# Altium PCB ALTAIR_PD_Sergeant_V26.2b_Reference.PcbDoc (part 4 of 4)
Units mm, origin at the board's own origin, x right, y up, seen from the top; angles counter-clockwise.
Board outline 74 x 56 mm, 4 copper layers (Top Layer, Layer 1, Layer 2, Bottom Layer), stack 1.675 mm thick; 187 components, 116 nets, 602 pads, 425 vias.
Unrouted connection lines stored in the file: 4.
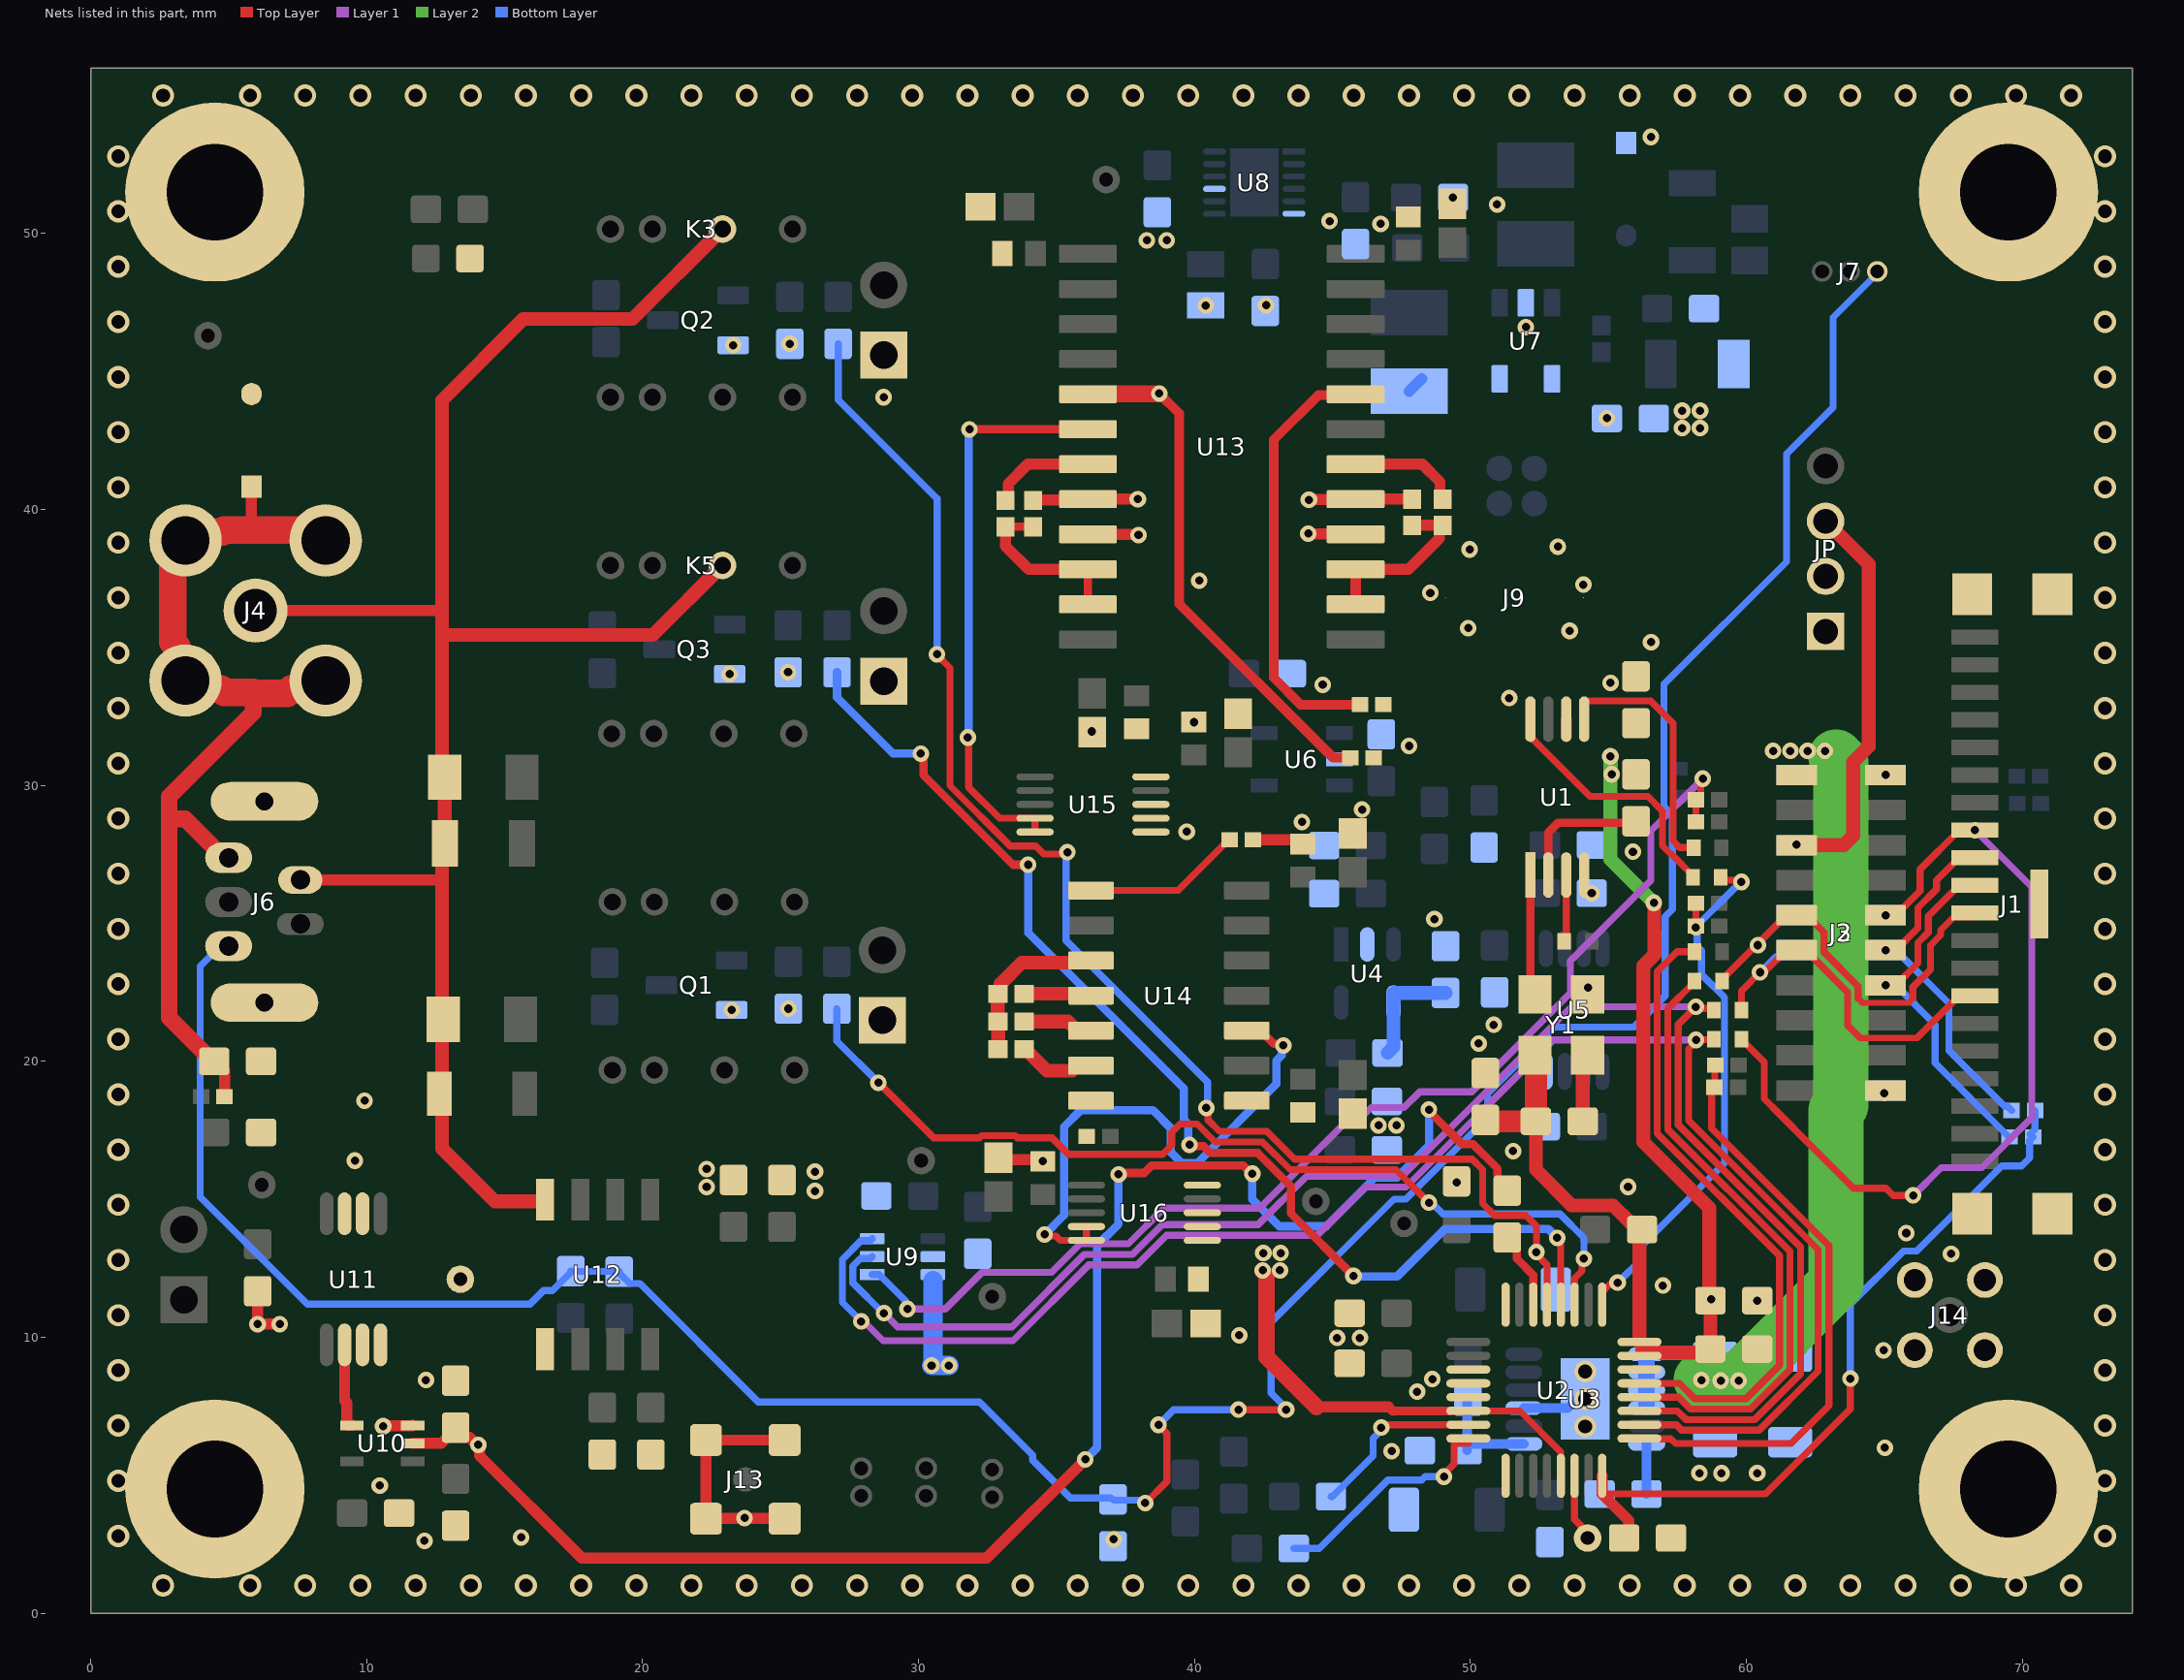
[diagram p5: the nets of this part, all layers, seen from the top]

## Via types
v1: diameter 0.6, hole 0.3, Top Layer to Bottom Layer, tented both sides, 244 vias
v2: diameter 0.8, hole 0.5, Top Layer to Bottom Layer, 122 vias
v3: diameter 0.6, hole 0.3, Top Layer to Bottom Layer, 59 vias

## Nets (pads, with @x,y where several pads share a name; then routed paths per layer and width w, separated by ;. In a path a pad name is that pad's centre, name@x,y a point inside that pad or via, vN(x,y) a via of type N, cw(c..) or ccw(c..) an arc to the next point about the centre after c; other vN are vias at no path point) (continued)
NetR5_2: R5.2 U2.10 U9.3 | length 61
  Top Layer w0.254: U2.10@56.129,6.829 57.464,6.829 57.659,6.635 60.466,6.635 62.6,8.769 62.6,13.177 57.915,17.862 57.915,20.453 58.181,20.719 v1(58.181,20.775) ; v1@58.315,20.785 58.815,20.785 R5.2@58.825,20.796
  Layer 1 w0.254: v1(27.925,10.575) 28.019,10.575 28.719,9.875 33.425,9.875 36.175,12.625 37.925,12.625 38.997,13.697 44.447,13.697 46.194,15.444 47.673,15.444 53.004,20.775 v1(58.181,20.775)
  Bottom Layer w0.254: v1(27.925,10.575) 27.24,11.26 27.24,12.82 27.922,13.502 28.252,13.502 U9.3@28.325,13.575
NetR6_2: R6.2 R7.2 R8.1 U2.8 | length 27.2
  Top Layer w0.254: U2.8@54.779,4.322 60.697,4.322 63.775,7.4 v1(63.775,8.5)
  Top Layer w0.4: U2.8@54.779,4.979 54.779,4.322 55.75,3.351 55.75,2.9 R8.1@55.575,2.725
  Bottom Layer w0.254: v1(63.775,8.5) 63.775,11.198 65.705,13.128 66.176,13.128 69.257,16.209 69.983,16.209 70.273,16.499 70.273,17.134 R7.2@70.396,17.257 ; R7.2@70.282,17.346 70.468,17.531 R6.2@70.468,18.218
NetR9_2: R9.2 R10.2 U9.1 | length 42.1
  Top Layer w0.254: R9.2@58.175,28.675 R10.2@58.175,29.479 58.197,29.479 58.345,29.627 58.348,29.627 58.348,30.067 58.429,30.148 v1(58.429,30.242)
  Layer 1 w0.254: v1(29.6,11.024) 30.979,11.024 32.31,12.356 34.828,12.356 35.859,13.387 37.609,13.387 38.9,14.678 42.368,14.678 45.515,17.825 45.91,17.825 46.407,18.322 47.597,18.322 48.172,18.897 50.048,18.897 53.628,22.477 53.628,23.638 56.54,26.55 56.54,28.353 v1(58.429,30.242)
  Bottom Layer w0.254: U9.1@28.325,12.275 28.575,12.275 29.534,11.316 29.534,11.091 v1(29.6,11.024)
NetR11_2: R11.2 U2.11 U9.2 | length 60.3
  Top Layer w0.254: U2.11@56.129,7.329 57.503,7.329 57.816,7.016 60.309,7.016 61.966,8.673 61.966,13.272 57.534,17.704 57.534,21.336 v1@58.11,21.913 ; v1(58.173,21.975) v1@58.11,21.913 ; R11.2@58.825,21.85 58.762,21.913 v1@58.11,21.913
  Layer 1 w0.254: v1(28.75,10.875) 29.248,10.377 33.389,10.377 36.017,13.006 37.767,13.006 38.839,14.078 42.307,14.078 44.054,15.825 47.515,15.825 53.665,21.975 v1(58.173,21.975)
  Bottom Layer w0.254: U9.2@28.325,12.925 28.252,12.852 27.893,12.852 27.621,12.58 27.621,11.97 28.716,10.875 v1(28.75,10.875)
NetR12_2: R12.2 R13.2 U2.9 | length 21.6
  Top Layer w0.254: U2.9@56.129,6.329 56.138,6.32 57.267,6.32 57.437,6.15 61.625,6.15 63,7.525 63,13.316 58.75,17.566 58.75,18.962 R13.2@58.85,19.062 ; R13.2@58.796,19.116 58.862,19.183 58.862,19.854 R12.2@58.875,19.866
NetR14_2: R14.2 U3.6 | length 1.8
  Bottom Layer w0.35: R14.2@56.388,4.32 U3.6@56.388,6.134
NetR16_1: R16.1 R17.2 U3.7 | length 3.6
  Bottom Layer w0.35: R17.2@49.89,5.913 R16.1@49.89,7.678 ; R17.2@50.112,6.136 U3.7@51.939,6.136
NetR19_1: R19.1 R20.2 U4.4 | length 4.1
  Bottom Layer w0.5: R19.1@47,20.309 47.219,20.527 U4.4@47.219,22.134 47.225,22.14 47.225,22.46 47.24,22.475 R20.2@49.1,22.475
NetR28_1: R28.1 R29.1 U10.2 | length 58.9
  Top Layer w0.3: v1(37.252,15.901) 37.303,15.952 38.18,15.952 38.453,16.225 41.774,16.225 42.074,15.925 v1(42.1,15.925) ; v1(48.5,18.25) 48.5,18.2 49.702,16.998 50.097,16.998 50.989,16.106 50.989,15.664 R28.1@51.339,15.314
  Top Layer w0.4: U10.2@11.67,6.153 12.703,6.153 R29.1@13.225,6.675 ; R29.1@13.225,6.725 R29.1@13.225,6.675 ; v1@14.012,6.143 13.958,6.143 13.726,6.375 13.525,6.375 R29.1@13.225,6.675 ; v1(14.05,6.105) 14.088,6.067 14.088,5.712 17.8,2 19.826,2 19.83,1.996 32.471,1.996 v1(36.05,5.575) ; R28.1@51.196,15.458 R28.1@51.339,15.314
  Bottom Layer w0.3: v1(36.05,5.575) 36.475,6 36.475,13.325 37.252,14.102 v1(37.252,15.901) ; v1(42.1,15.925) 42.1,14.998 43.077,14.021 44.774,14.021 46.544,15.791 47.341,15.791 48.5,16.95 v1(48.5,18.25)
NetR28_2: R28.2 U2.22 | length 2.8
  Top Layer w0.3: R28.2@51.339,13.614 51.689,13.264 51.689,12.846 52.279,12.256 U2.22@52.279,11.179
NetR30_2: R30.2 U2.19 | length 35
  Top Layer w0.254: v1(28.55,19.225) 30.55,17.225 32.21,17.225 32.292,17.307 33.508,17.307 33.59,17.225 34.842,17.225 35.438,16.629 38.852,16.629 39.175,16.952 39.175,17.429 39.474,17.728 40.103,17.728 40.751,17.08 42.464,17.08 43.471,16.073 47.305,16.073 v1(48.502,14.876) ; U2.19@53.779,11.179 53.788,11.188 53.788,12.138 54.051,12.401 54.051,12.78 v1(54.117,12.846)
  Bottom Layer w0.254: R30.2@27.04,21.907 27.04,20.735 v1(28.55,19.225) ; v1(48.502,14.876) 48.596,14.876 49.007,14.464 53.249,14.464 54.117,13.596 v1(54.117,12.846)
NetR33_2: R33.2 U2.21 | length 52.1
  Top Layer w0.254: v1(30.675,34.75) 30.675,34.72 31.141,34.253 31.141,29.984 33.325,27.8 34.25,27.8 34.541,27.509 35.334,27.509 v1(35.4,27.575) ; v1(40.431,18.309) 40.497,18.242 40.497,17.872 40.908,17.461 42.622,17.461 43.629,16.454 50.07,16.454 50.45,16.074 50.45,14.85 50.882,14.418 52.007,14.418 52.396,14.029 v1(52.396,13.087) 52.396,13.006 52.779,12.623 U2.21@52.779,11.179
  Bottom Layer w0.254: R33.2@27.092,46.003 27.092,43.973 30.665,40.4 30.675,40.4 v1(30.675,34.75) ; v1(35.4,27.575) 35.351,27.526 35.351,24.374 40.477,19.248 40.477,18.354 v1(40.431,18.309)
NetR36_2: R36.2 U2.20 | length 42.5
  Top Layer w0.254: v1(53.15,13.6) 53.15,13.519 53.279,13.39 U2.20@53.279,11.179
  Top Layer w0.3: v1@30.125,31.125 30.179,31.071 30.179,30.375 33.429,27.125 v1(33.975,27.125) ; v1(39.822,16.978) 39.879,16.921 40.339,16.921 40.583,16.676 42.297,16.676 43.496,15.477 43.496,14.49 v1(45.765,12.221)
  Bottom Layer w0.3: R36.2@27.05,34.1 27.05,33.187 29.086,31.151 30.085,31.151 v1(30.086,31.152) ; v1(33.975,27.125) 33.975,24.663 39.625,19.012 39.625,17.878 39.775,17.728 39.775,17.025 v1(39.822,16.978) ; v1@45.775,12.2 47.35,12.2 49.075,13.925 52.824,13.925 v1(53.15,13.6)
NetR42_1: R42.1 U2.31 | length 6.5
  Top Layer w0.254: v1(46.775,6.725) 46.869,6.725 46.973,6.829 U2.31@49.929,6.829
  Bottom Layer w0.254: R42.1@44.95,4.225 45,4.225 46.475,5.7 46.475,6.331 46.775,6.631 v1(46.775,6.725)
NetR44_1: R44.1 U2.32 | length 8.4
  Top Layer w0.254: v1(49.045,4.947) 49.045,5.041 49.402,5.398 49.406,5.402 49.406,6.129 49.427,6.15 49.929,6.15
  Bottom Layer w0.254: R44.1@43.6,2.346 44.532,2.346 47.012,4.826 48.237,4.826 48.358,4.947 v1(49.045,4.947)
NetR46_2: R46.2 R47.2 U13.2 U13.3 | length 6.4
  Top Layer w0.4: U13.2@45.843,36.56 45.843,37.83 47.755,37.83 48.875,38.95 48.875,39.3 R47.2@49,39.425 R46.2@47.9,39.425
NetR47_1: R47.1 U13.6 | length 4
  Top Layer w0.4: U13.6@45.843,41.64 48.26,41.64 48.901,40.999 48.901,40.499 R47.1@49,40.4
NetR48_1: R48.1 U13.8 | length 15.8
  Top Layer w0.35: U13.8@45.803,44.139 44.489,44.139 42.875,42.525 42.875,33.9 43.85,32.925 R48.1@46,32.925
  Top Layer w0.4: U13.8@45.803,44.139 U13.8@45.843,44.18
NetR49_2: R49.2 R50.2 U13.22 U13.23 | length 6.3
  Top Layer w0.3: R50.2@33.15,39.35 33.175,39.375 R49.2@34.154,39.375 ; U13.23@36.143,36.56 U13.22@36.143,37.83
  Top Layer w0.4: R50.2@33.15,39.375 33.15,38.675 33.995,37.83 U13.22@36.143,37.83
NetR50_1: R50.1 U13.19 | length 3.8
  Top Layer w0.3: R50.1@33.15,40.325 R50.1@33.256,40.431
  Top Layer w0.4: R50.1@33.256,40.431 33.256,40.931 33.965,41.64 U13.19@36.143,41.64
NetR51_1: R51.1 U13.17 | length 19
  Top Layer w0.35: v1(38.725,44.2) 39.45,43.475 39.45,36.575 45.025,31 R51.1@45.65,31
  Top Layer w0.4: U13.17@36.143,44.18 U13.17@36.153,44.19 ; v1@38.715,44.19 v1(38.725,44.2)
  Top Layer w0.6: U13.17@36.153,44.19 v1@38.715,44.19
NetR52_1: R52.1 R53.1 R54.1 U14.3 | length 6.1
  Top Layer w0.5: R54.1@32.9,20.441 32.888,20.454 32.888,21.433 R53.1@32.875,21.446 R52.1@32.875,22.45 32.9,22.45 32.975,22.525 32.975,22.808 33.743,23.576 36.175,23.576 U14.3@36.25,23.651
NetR52_2: R52.2 U14.4 | length 2.5
  Top Layer w0.5: R52.2@33.825,22.45 36.181,22.45 U14.4@36.25,22.381
NetR53_2: R53.2 U14.5 | length 2.6
  Top Layer w0.5: R53.2@33.825,21.446 35.415,21.446 35.675,21.186 36.175,21.186 U14.5@36.25,21.111
NetR54_2: R54.2 U14.6 | length 2.8
  Top Layer w0.5: R54.2@33.85,20.441 33.925,20.366 33.95,20.366 34.657,19.659 35.568,19.659 35.75,19.841 U14.6@36.25,19.841
NetR55_1: R55.1 U14.1 | length 5.8
  Top Layer w0.254: U14.1@36.25,26.191 39.406,26.191 41.25,28.035 R55.1@41.275,28.035
NetR56_1: R56.1 U2.12 | length 22.6
  Top Layer w0.254: U2.12@56.129,7.829 57.542,7.829 57.974,7.397 60.151,7.397 61.585,8.831 61.585,13.114 57.153,17.546 57.153,21.903 58.125,22.875 R56.1@58.125,22.916
NetR57_1: R57.1 U2.13 | length 23.6
  Top Layer w0.254: U2.13@56.129,8.329 57.581,8.329 58.132,7.778 59.993,7.778 61.204,8.989 61.204,12.956 56.772,17.388 56.772,23.253 57.494,23.975 58.121,23.975 R57.1@58.125,23.971
NetR58_1: R58.1 Y1.1 | length 2.4
  Top Layer w0.254: Y1.1@54.075,20.004 Y1.1@54.225,20.154
  Top Layer w0.5: R58.1@54.075,17.825 Y1.1@54.075,20.004
NetR59_1: R59.1 U1.2 | length 4.9
  Top Layer w0.3: U1.2@52.825,26.75 52.825,28.295 53.176,28.646 55.95,28.646 R59.1@56.004,28.7
NetR60_2: R60.2 U1.3 | length 2.3
  Top Layer w0.254: R60.2@53.475,24.425 U1.3@53.475,26.75
NetR61_1: R61.1 R63.1 R64.2 U2.17 | length 20.2
  Top Layer w0.254: U2.17@54.779,11.179 54.779,11.638 55.054,11.912 55.274,11.912 v1(55.34,11.978) ; v1(58.171,24.852) 58.171,24.896 R64.2@58.175,24.9 R63.1@58.175,25.725 ; R61.1@59.08,26.77 59.198,26.652 59.198,26.566 59.759,26.566 v1(59.825,26.5)
  Bottom Layer w0.254: v1(55.34,11.978) 56.225,12.863 56.225,13.327 59.209,16.311 59.209,22.316 58.375,23.15 58.375,24.017 58.218,24.174 58.218,24.806 v1(58.171,24.852) ; v1@58.173,24.855 58.173,24.875 59.798,26.5 v1(59.825,26.5)
NetR61_2: R61.2 U1.8 | length 9.4
  Top Layer w0.25: U1.8@52.175,32.4 52.175,31.763 54.34,29.598 56.439,29.598 56.97,29.068 56.97,27.805 57.284,27.491 57.309,27.491 58.075,26.725 R61.2@58.075,26.675
NetR62_2: R62.2 U1.5 | length 9.3
  Top Layer w0.25: U1.5@54.125,32.4 54.125,32.996 54.185,33.056 56.535,33.056 57.347,32.245 57.347,27.986 57.583,27.75 58.096,27.75 R62.2@58.1,27.746
NetTP8_1: TP8.1 U2.6 | length 2.4
  Top Layer w0.254: U2.6@53.779,4.979 53.779,3.398 54.25,2.927 TP8.1@54.25,2.725
NetU1_1: U1.1 Y1.3 | length 4.4
  Top Layer w0.3: U1.1@52.175,26.75 52.171,26.745 52.171,22.604 Y1.3@52.35,22.425
NetU10_4: U10.4 U11.6 | length 3.1
  Top Layer w0.4: U11.6@9.202,9.725 9.202,7.708 9.282,7.628 9.282,6.828 9.307,6.803 U10.4@9.47,6.803
NetU13_18: U13.18 U15.9 U15.10 | length 20.7
  Top Layer w0.254: v1(31.788,31.736) 31.819,31.705 31.819,29.93 32.94,28.81 U15.9@34.225,28.81 U15.10@34.225,28.31
  Top Layer w0.3: v1(31.85,42.9) 31.855,42.905 36.138,42.905 U13.18@36.143,42.91
  Bottom Layer w0.3: v1@31.804,31.721 31.819,31.736 31.819,42.869 v1(31.85,42.9)
NetU14_10: U14.10 U16.9 U16.10 | length 19.8
  Top Layer w0.254: v1(34.575,13.725) 34.628,13.672 34.977,13.672 35.137,13.512 U16.10@36.088,13.512 ; U16.10@36.088,13.506 U16.9@36.088,14.012
  Top Layer w0.3: U14.10@41.9,21.111 42.4,21.111 42.879,20.632 43.168,20.632 v1(43.225,20.575)
  Bottom Layer w0.3: v1(34.575,13.725) 35.275,14.425 35.275,17.625 35.875,18.225 38.498,18.225 39.145,17.578 39.145,16.707 39.544,16.308 40.1,16.308 42.975,19.183 42.975,20.024 43.168,20.217 43.168,20.518 v1(43.225,20.575)
PD_A: C30.1 C31.1 J4.1 J6.2 K3.3 K5.3 R39.1 R40.1 U12.8 | length 67.8
  Top Layer w0.3: 12.707,25.325 12.732,25.35
  Top Layer w0.4: J4.1@5.975,36.336 12.732,36.336 ; J6.2@7.6,26.575 12.732,26.575
  Top Layer w0.5: C30.1@12.632,18.826 C30.1@12.732,18.826 ; R39.1@12.775,21.525 R39.1@12.732,21.525 ; U12.8@16.47,14.987 16.409,14.926 14.649,14.926 12.732,16.843 C30.1@12.732,18.826 ; K5.3@22.898,37.971 20.377,35.45 12.732,35.45 ; K3.3@22.898,50.163 19.635,46.9 15.675,46.9 12.732,43.957 12.732,36.336 12.732,35.45 ; C30.1@12.732,18.826 R39.1@12.732,21.525 ; R39.1@12.732,21.525 12.732,25.35 12.732,26.575 12.732,27.496 12.832,27.596 R40.1@12.832,30.295 12.732,30.395 12.732,35.45
PD_K: C0.2 D3.1 J4.2 J4.3 J4.4 J4.5 J6.1 R0.2 | length 37.8
  Top Layer w0.254: 5.775,39.25 5.825,39.3
  Top Layer w0.4: 2.85,21.575 2.85,21.725 ; C0.2@4.425,20 C0.2@4.475,20 ; C0.2@4.525,20 4.85,19.675 R0.2@4.85,18.721 ; 5.825,39.3 D3.1@5.825,40.82 ; 5.875,33.375 5.909,33.341
  Top Layer w0.6: 2.85,21.575 C0.2@4.425,20 ; 2.85,21.725 2.85,28.673 ; J6.1@5,27.375 4.835,27.375 3.426,28.785 2.962,28.785 2.85,28.673 ; 5.892,33.358 5.892,32.642 2.85,29.6 2.85,28.673
  Top Layer w1: 5.875,33.375 4.833,33.375 4.723,33.485 3.746,33.485 J4.5@3.435,33.796 2.975,33.796 3.124,33.945 3.124,35.045 2.975,35.195 2.975,37.977 3.435,38.437 J4.4@3.435,38.876 3.746,39.187 4.77,39.187 4.833,39.25 5.775,39.25 7.702,39.25 8.075,38.876 J4.2@8.515,38.876 ; 5.909,33.341 7.117,33.341 7.261,33.485 8.204,33.485 J4.3@8.515,33.796
SOLDIER_GUARD: J9.2 J9.3
  other v1: 53.6,35.6 49.925,35.7 48.55,36.975 54.1,37.275 49.975,38.55 53.175,38.65
SPI_MISO: J1.11 J2.10 J3.09 R56.2 | length 16.3
  Top Layer w0.225: 64.221,22.12 65.879,22.12
  Top Layer w0.23: 64.056,22.285 64.221,22.12 ; 65.879,22.12 66.041,22.281
  Top Layer w0.254: R56.2@59.125,22.916 59.125,22.966 60.368,24.209 v1(60.42,24.208) ; v1@60.506,24.122 60.506,24.346 61.456,25.295 62.192,25.295 62.819,24.668 62.819,23.956 64.056,22.719 64.056,22.285 ; 66.041,22.281 66.041,22.691 66.675,23.325 66.675,24.204 67.05,24.579 67.05,24.753 67.524,25.227 68.143,25.227 J1.11@68.291,25.375
  Bottom Layer w0.254: v1(60.42,24.208) 60.419,24.259 61.456,25.295 J3.09@61.824,25.295
SPI_MOSI: J1.8 J2.09 J3.10 R5.1 | length 31.1
  Top Layer w0.254: R5.1@59.825,20.796 59.825,20.746 59.948,20.623 59.998,20.623 60.65,19.971 60.65,18.636 61.202,18.084 62.276,17.01 63.886,15.4 65.065,15.4 65.325,15.14 v1(66.053,15.14) ; v1(65.05,25.295) 65.418,25.295 66.3,26.177 66.3,26.959 67.716,28.375 v1(68.291,28.375)
  Layer 1 w0.254: v1(66.053,15.14) 67.062,16.149 68.538,16.149 70.35,17.961 70.35,26.316 v1(68.291,28.375)
SPI_SCLK: J1.14 J2.12 J3.11 R11.1 | length 14.1
  Top Layer w0.225: 64.125,20.85 66.191,20.85
  Top Layer w0.254: R11.1@59.825,21.85 59.825,22.55 60.566,23.291 60.722,23.291 61.456,24.025 62.192,24.025 62.434,23.784 62.434,23.741 63.675,22.5 63.675,21.3 64.125,20.85 ; 66.191,20.85 J1.14@67.568,22.227 ; J1.14@67.568,22.227 67.716,22.375 J1.14@68.291,22.375
  Bottom Layer w0.254: v1(60.5,23.225) 61.059,23.784 61.583,23.784 J3.11@61.824,24.025
STRT1: J1.9 J2.11 J3.12 R6.1 | length 13.2
  Top Layer w0.254: v1(65.05,24.025) 65.418,24.025 66.222,24.829 66.222,25.56 66.9,26.238 66.9,26.559 67.716,27.375 J1.9@68.291,27.375
  Bottom Layer w0.254: v1(65.05,24.025) 65.418,24.025 67.343,22.1 67.343,20.392 69.37,18.366 69.47,18.366 R6.1@69.618,18.218
STRT2: J1.10 J2.13 J3.14 R7.1 | length 13.1
  Top Layer w0.254: v1(65.05,22.755) 65.418,22.755 66.225,23.562 66.225,24.293 66.603,24.671 66.603,25.262 67.716,26.375 J1.10@68.291,26.375
  Bottom Layer w0.254: v1(65.05,22.755) 65.418,22.755 66.841,21.332 66.841,19.936 69.521,17.257 R7.1@69.546,17.257
SYS_DVDD: C51.2 C52.2 C54.2 C55.2 J2.06 J3.05 JP.3 R1.1 R58.2 R59.2 U1.6 U2.15 U2.16 Y1.4 | length 56.7
  Top Layer w0.254: Y1.4@52.325,20.154 Y1.4@52.375,20.104
  Top Layer w0.4: U1.6@53.475,31.782 U1.6@53.475,32.4 ; v1(55.075,31.05) v1@55.129,31.05
  Top Layer w0.5: R58.2@52.375,17.825 52.375,16.075 53.673,14.777 55.173,14.777 55.8,14.15 55.925,14.15 56.089,13.986 56.089,13.861 56.129,13.821 U2.16@56.129,9.829 56.229,9.729 56.229,9.518 56.301,9.446 58.571,9.446 C51.2@58.7,9.575 C52.2@58.7,11.329 ; v1(56.651,25.746) 56.67,25.727 56.67,24.699 56.675,24.694 56.675,23.869 56.268,23.462 56.268,17.079 58.658,14.689 58.658,11.371 C52.2@58.7,11.329 ; v1(58.725,11.375) 58.7,11.375 C52.2@58.7,11.329 ; J2.06@61.824,27.835 63.535,27.835 63.875,28.175 63.875,30.85 64.437,31.412 64.437,38.013 JP.3@62.875,39.575
  Top Layer w0.8: C54.2@50.596,17.825 R58.2@52.375,17.825 Y1.4@52.375,20.104
  Layer 2 w0.5: v1@55.075,31.023 55.106,30.992 55.106,30.419 v1(55.125,30.4) ; v1(55.075,31.05) 55.075,27.321 v1(56.651,25.746)
  other v1: 61.824,27.86
SYS_GND: C0.1 C00.1 C1.1 C2.1 C3.1 C4.1 C5.1 C6.1 C7.1 C8.1 C9.1 C10.1 C11.1 C12.1 C13.1 C14.1 C17.2 C18.2 C19.2 C20.2 C21.2 C22.1 C23.1 C24.1 C25.1 C26.1 C27.1 C28.1 C29.1 C33.1 C34.1 C35.1 C36.1 C37.1 C38.1 C39.1 C40.1 C41.1 C42.1 C43.1 C44.1 C45.1 C46.1 C47.1 C48.1 C49.1 C50.1 C51.1 C52.1 C53.1 C54.1 C55.1 C56.1 D1.1 D2.1 D3.2 H1.1 H2.1 H3.1 H4.1 J1.MP1 J1.MP2 J1.MP3 J1.MP4 J1.MP5 J2.01 J2.19 J3.02 J3.20 J6.6 J10.1 J11.1 J12.1 J13.2 J14.2 J14.3 J14.4 J14.5 JP.2 Q1.2 Q2.2 Q3.2 R8.2 R14.1 R15.1 R17.1 R20.1 R22.1 R25.1 R26.2 R27.2 R29.2 R31.2 R34.2 R37.2 R45.2 R46.1 R48.2 R49.1 R51.2 R55.2 R99.1 U1.4 U2.1 U2.14 U2.24 U2.27 U2.28 U2.29 U3.9 U3.13 U4.2 U5.4 U6.2 U7.2 U8.6 U8.9 U9.5 U10.3 U11.2 U11.3 U11.7 U12.1 U13.4 U13.5 U13.20 U13.21 U14.7 U14.8 U15.1 U15.2 U15.3 U15.5 U16.1 U16.2 U16.3 U16.5 Y1.2 | length 29.1
  Top Layer w0.3: U2.24@51.279,11.179 U2.24@51.279,11.65
  Top Layer w0.4: C25.1@6.055,11.669 6.053,11.667 6.053,10.478 v1(6.05,10.475) v1(6.85,10.475) ; v1(10.6,6.775) 10.614,6.789 11.656,6.789 U10.3@11.67,6.803 ; J13.2@25.15,3.425 25.138,3.437 23.713,3.437 v1(23.7,3.45) 23.688,3.437 22.312,3.437 J13.2@22.3,3.425 J13.2@22.3,6.275 J13.2@25.15,6.275 ; C46.1@32.9,16.501 32.963,16.438 34.445,16.438 v1(34.507,16.375) ; R49.1@34.154,40.325 34.177,40.347 36.121,40.347 36.146,40.372 37.948,40.372 v1(37.95,40.375) ; U13.21@36.143,39.1 37.933,39.1 v1@37.95,39.117 ; R55.2@42.125,28.035 43.772,28.035 C37.1@43.932,27.875 ; v1(44.125,39.125) 44.137,39.112 45.831,39.112 U13.4@45.843,39.1 ; v1(44.15,40.35) 44.16,40.36 45.833,40.36 45.846,40.372 47.898,40.372 R46.1@47.9,40.375
  Bottom Layer w0.35: U3.9@51.939,7.436 53.539,7.436 53.778,7.675 54.078,7.675 U3.13@54.164,7.761
  other v1: 12.1,2.625 37.075,2.674 15.6,2.75 10.475,4.625 58.3,5.075 59.1,5.07 60.4,5.075 47.15,5.875 65.025,6 48.075,8.025 12.15,8.45 48.625,8.48 64.975,9.525 45.175,9.975 46,9.975 41.625,10.075 60.4,11.329 56.975,11.875 67.425,13.025 65.8,13.775 26.25,15.3 22.325,15.445 55.717,15.453 49.5,15.613 26.25,16 22.325,16.1 9.575,16.4 51.55,16.75 46.675,17.675 47.325,17.675 9.925,18.575 65,18.85 50.3,20.65 50.85,21.325 23.232,21.857 25.286,21.907 54.275,22.675 48.7,25.15 54.4,26.09 55.893,27.596 39.722,28.325 43.897,28.675 46.075,29.125 65.05,30.375 47.778,31.428 36.277,31.955 39.991,32.288 51.407,33.162 44.65,33.645 55.082,33.718 23.157,34.031 25.275,34.1 56.552,35.188 40.175,37.425 37.976,39.076 54.95,43.304 28.74,44.067 23.284,45.953 25.338,46.003 52.016,46.61 40.415,47.392 42.6,47.4 38.275,49.75 39,49.75 46.75,50.35 44.9,50.45 50.968,51.05 49.375,51.3 56.55,53.5
  other v2: 2.625,1 5.775,1 7.775,1 9.775,1 11.775,1 13.775,1 15.775,1 17.775,1 19.775,1 21.775,1 23.775,1 25.775,1 27.775,1 29.775,1 31.775,1 33.775,1 35.775,1 37.775,1 39.775,1 41.775,1 43.775,1 45.775,1 47.775,1 49.775,1 51.775,1 53.775,1 55.775,1 57.775,1 59.775,1 61.775,1 63.775,1 65.775,1 67.775,1 69.775,1 71.775,1 1,2.8 73,2.8 1,4.8 73,4.8 1,6.8 73,6.8 1,8.8 73,8.8 1,10.8 73,10.8 1,12.8 73,12.8 1,14.8 73,14.8 1,16.8 73,16.8 1,18.8 73,18.8 1,20.8 73,20.8 1,22.8 73,22.8 1,24.8 73,24.8 1,26.8 73,26.8 1,28.8 73,28.8 1,30.8 73,30.8 1,32.8 73,32.8 1,34.8 73,34.8 1,36.8 73,36.8 1,38.8 73,38.8 1,40.8 73,40.8 1,42.8 73,42.8 1,44.8 73,44.8 1,46.8 73,46.8 1,48.8 73,48.8 1,50.8 73,50.8 1,52.8 73,52.8 2.625,55 5.775,55 7.775,55 9.775,55 11.775,55 13.775,55 15.775,55 17.775,55 19.775,55 21.775,55 23.775,55 25.775,55 27.775,55 29.775,55 31.775,55 33.775,55 35.775,55 37.775,55 39.775,55 41.775,55 43.775,55 45.775,55 47.775,55 49.775,55 51.775,55 53.775,55 55.775,55 57.775,55 59.775,55 61.775,55 63.775,55 65.775,55 67.775,55 69.775,55 71.775,55
SYS_VBAT: C1.2 C2.2 C14.2 J2.02 J3.01 JP.1 L1.1 U3.1 U3.2 U3.3 U3.4 U7.4 U7.5 | length 31.2
  Layer 2 w2: v1(58.375,8.45) 59.75,8.45 63.25,11.95 63.25,18.221 63.433,18.404 63.433,30.842 63.25,31.025 ; v1(59.075,8.425) 59.05,8.4 59.4,8.4 59.425,8.425 v1(59.725,8.425)
  Bottom Layer w0.4: L1.1@47.784,44.281 L1.1@48.238,44.735
  Bottom Layer w0.5: U3.1@56.393,9.424 C1.2@58.748,9.424
  Bottom Layer w0.6: U3.4@56.389,7.478 U3.3@56.389,8.086 U3.2@56.389,8.736 U3.1@56.389,9.386
  other v1: 60.975,31.25 61.6,31.25 62.225,31.25 62.85,31.25 57.675,42.95 58.325,42.95 57.675,43.575 58.325,43.575
TMP_COM: C32.1 J6.5 J7.3 R45.1 RT1.1 | length 110.5
  Top Layer w0.254: v1(38.22,3.991) 39,4.771 39,6.507 38.7,6.807 v1(38.7,6.828) ; v1(41.6,7.375) v1(43.325,7.375)
  Bottom Layer w0.254: J6.5@5,24.175 4.7,24.175 3.969,23.444 3.969,15.081 7.85,11.2 15.925,11.2 16.415,11.69 16.74,11.69 17.4,12.35 RT1.1@17.4,12.4 17.413,12.387 19.142,12.387 C32.1@19.154,12.375 19.154,12.325 19.527,11.952 19.902,11.952 24.198,7.657 32.212,7.657 34.135,5.733 34.135,5.543 35.504,4.175 R45.1@36.975,4.175 ; R45.1@37.05,4.125 37.075,4.1 38.018,4.1 38.127,3.991 v1(38.22,3.991) ; v1(38.7,6.828) 38.702,6.828 39.249,7.375 v1(41.6,7.375) ; v1(43.325,7.375) 43.325,7.43 42.781,7.974 42.781,10.552 47.235,15.006 47.666,15.006 50.619,17.959 50.619,18.824 53.039,21.244 55.938,21.244 57.063,22.369 57.063,25.243 57.298,25.478 57.298,25.481 57.322,25.505 57.322,28.944 57.021,29.245 57.021,33.665 61.462,38.106 61.462,42.012 63.15,43.7 63.15,46.956 64.75,48.556 J7.3@64.75,48.625
VBIAS: TP6.1 U2.5 U2.30 U9.6 U11.8 | length 19.9
  Top Layer w0.254: U2.30@49.929,7.329 51.796,7.329 53.279,5.846 U2.5@53.279,4.979
  Top Layer w0.3: 47.19,7.328 U2.30@49.278,7.328 ; U2.30@49.279,7.329 U2.30@49.929,7.329
  Top Layer w0.35: 47.041,7.477 47.19,7.328
  Top Layer w0.4: v1@42.487,13.013 v1@42.5,13.025 ; 44.423,7.477 47.041,7.477
  Top Layer w0.6: v1@42.475,12.4 42.613,12.262 42.613,9.973 42.613,9.287 44.423,7.477
  Bottom Layer w0.7: 30.525,12.05 30.525,9.025 v1(30.475,8.975) v1(31.1,8.975)
  other v1: 42.475,12.425 43.1,12.425 42.5,13.05 43.125,13.05
pads on no net: U1.7 U2.7 U2.25 U3.5 U5.1 U5.3 U5.7 U5.8 U8.4 U8.7 U11.5 U12.3

## Polygon pours and split planes (outlines as drawn)
SYS_GND on Layer 2 "SYS_GND_L03_P001" (solid, pour order 49): 0.025,56 74,56 74,0 0.1,0 0.025,0.075
SYS_VBAT on Layer 2 "SYS_VBAT_L03_P001" (solid, pour order 35): 58.148,39.237 58.8,33 60.025,31.125 60.075,31.125 60.775,30.425 63.65,30.425 64.3,31.075 64.3,36.325 62.164,36.59 59.225,42.475 58.55,43.95 57.375,43.95 57.225,43 57.625,41.25
7V5 on Layer 2 "7V5_L03_P001" (solid, pour order 15): 48.475,12.75 50.25,12.75 50.25,11.625 47.875,9.85 25.877,10.073 24.925,11.025 24.925,14.65 41.325,14.65 41.925,14.05 41.925,12.125 46.878,12.125 47.521,12.768
7V5 on Layer 2 "7V5_L03_P002" (solid, pour order 16): 41.225,15.325 41.101,15.325 40.288,14.512 41.225,13.574 41.225,13.325 43.8,13.325 45.9,15.425 45.9,20.55 48.675,23.325 48.675,47.525 40.375,50.025 35.85,51.325 35.5,51.9 34.332,51.9 33.812,50.863 39.688,33.938 42.5,31.125 42.5,28.85 42.55,28.8 41.225,27.475
-15V on Layer 2 "-15V_L03_P002" (solid, pour order 2): 47.975,34.11 46.325,37.2 46.325,48.725 46.975,49.375 47.625,48.725 50,48.787 50.538,48.787 51.4,47.925 51.4,21.95 49.638,20.188 49.375,20.125 47.975,20.125 47.725,20.375 47.725,22.1 47.975,22.35
SYS_DVDD on Layer 2 "SYS_DVDD_L03_P001" (solid, pour order 47): 62.157,27.51 61.6,26.953 61.6,25.675 60.7,24.775 57.025,24.775 56.95,24.85 56.175,25.7 56.625,26.15 57.075,26.15 58.575,26.275 59.823,26.5 61.499,28.176 62.2,28.176 62.162,27.513
-15V on Layer 2 "-15V_L03_P001" (solid, pour order 1): 35.85,51.85 35.85,50.95 36.5,50.75 46.381,45.707 49.7,47.775 50.023,47.756 51.137,48.497 37.787,52.887 36.5,53.075 35.85,52.425
SYS_GND on Layer 1 "SYS_GND_L02_P001" (solid, pour order 31): 0,56 0.025,55.975 74,55.975 74,0 0.05,0
A5V on Layer 1 "A5V_L02_P001" (solid, pour order 19): 29.126,16.627 29.625,15.5 42.687,20.787 52.875,28.65 52.9,30.9 52.875,30.925 52.787,30.837 51.351,30.9 45.155,26.921 45.2,25.825 44.586,25.211 42.493,25.211 41.87,24.811 39.925,26.756 39.925,33.475 39.7,33.7 37.75,33.7 37.75,31.225 35.784,29.259 35.82,20.926
VBIAS on Layer 1 "VBIAS_L02_P001" (solid, remove dead copper, pour order 29): 42.3,13.575 42.325,13.55 43.85,13.55 43.85,11.982 26.677,4.65 17.112,4.65 12.325,7.734 12.325,10.675 12.325,13 12.825,13.5 13.85,13.5 14.4,12.95 14.4,9.843 16.979,7.534 19.115,6.832 33.175,13 35.94,13.396
-15V on Layer 1 "-15V_L02_P001" (solid, pour order 3): 39.374,14.748 20.7,7.575 19.3,7.75 19.525,8.75 38.4,16.3 40.725,17.574 47.75,21.825 49.45,21.825 49.45,20.175 46.1,18.199 44.03,16.979 42.878,16.3 42.075,15.826
SYS_GND on Top Layer "SYS_GND_L01_P002" (solid, remove dead copper, pour order 50): 60.2,41.15 60.2,38.921 60.721,38.4 61.95,38.4 61.95,41.075 61.9,41.15 74,41.15 74,56 0.025,56 0.05,0.075 0.125,0 53.275,0 53.15,0.125 53.15,13.975 57.275,18.1 57.275,38.25 57.3,38.25
SYS_GND on Top Layer "SYS_GND_L01_P001" (solid, remove dead copper, pour order 48): 54.164,1.925 52.975,1.925 52.975,0 74,0 74,42.113 63.125,42.113 61.95,41.263 61.95,40.063 60.75,40.063 58.5,37.813 58.5,17.398 54.164,13.062
SYS_DVDD on Top Layer "SYS_DVDD_L01_P001" (solid, pour order 43): 56.7,30 56.704,30.004 56.704,32.696 56.5,32.9 55.475,32.9 55.125,32.55 55.125,31.375 54.025,31.375 53.493,31.993 53.15,31.65 53.15,31.125 54.475,29.8 56.475,29.8
GUARD on Top Layer "GUARD_L01_P004" (solid, pour order 40): 21.275,47.25 20.925,47.25 19.611,45.936 22.619,42.968 26.103,39.403 28.372,39.403 33.625,34.15 39.075,34.15 39.3,34.375 39.3,42.45 33.2,42.45 32.2,41.45 32.2,38.605 28.969,41.675 26.85,41.675
GUARD on Top Layer "GUARD_L01_P003" (solid, pour order 38): 21.975,38.6 22.1,38.75 22.225,38.85 22.375,38.925 22.55,39 22.8,39.043 22.925,39.025 23.1,39 23.3,38.925 23.425,38.85 23.525,38.8 23.649,38.701 23.8,38.475 23.913,38.188 23.925,37.975 23.9,37.8 23.85,37.55 23.767,37.35 23.675,37.225 23.55,37.15 23.25,37.05 21.529,35.329 21.527,35.329 20.748,34.55 19.499,34.551 19.498,34.55 14.55,34.55 14.55,17.075 15.375,16.25 17.75,16.25 18.05,15.95 18.05,14.087 17.374,13.625 13.232,13.625 11.075,15.968 11.075,33.084 9.993,34.166 4.532,34.166 3.262,35.436 3.262,37.341 4.405,38.484 10.628,38.484 11.547,39.403 11.55,44.175 15.175,47.8 19.3,47.8 21.7,50.2 21.741,50.525 21.8,50.725 22,51.044 22.276,51.224 22.425,51.275 22.575,51.3 22.8,51.325 23,51.325 23.2,51.3 23.4,51.25 23.508,51.218 23.767,51.036 24.062,50.69 24.1,50.55 24.1,49.962 23.961,49.649 23.709,49.367 23.325,49.175 21.288,47.137 21.313,47.112 20.355,46.154 20.35,46.154 20.125,45.925 16.075,45.925 13.975,43.825 13.975,40.158 14.55,39.525 14.55,36.3 20.075,36.3 21.9,38.125 21.9,38.45
GUARD on Top Layer "GUARD_L01_P002" (solid, pour order 34): 22.214,30.651 21.475,31.39 21.475,32.925 19.75,34.65 19.825,34.725 20.725,34.725 20.725,34.875 21.425,35.575 24.025,32.975 24.039,31.538 27.021,28.425 30.468,28.425 32.85,26.2 ccw(c33.293,26.758) 33.375,26.05 36.74,26.113 37.65,25.203 37.65,18.966 32.708,18.966 31.839,19.836 31.839,23.739 32.087,23.987 29.525,26.55 26.194,26.55 22.225,30.625
NetJ_ACF_1 on Top Layer "NetJ_ACF_1_L01_P001" (solid, pour order 8): 33.264,31.525 34.237,30.552 34.637,30.552 34.637,29.079 33.135,29.079 32.462,29.752 32.462,31.263 32.725,31.525
VBIAS on Top Layer "VBIAS_L01_P002" (solid, pour order 30): 12.669,12.75 10.25,10.425 10.25,9.875 10.723,9.875 13.651,11.491 13.667,11.491 14.025,11.85 14.025,12.475 13.75,12.75
VBIAS on Top Layer "VBIAS_L01_P001" (solid, pour order 27): 42.15,13.375 43.5,13.375 43.5,12.1 43.375,11.975 42.8,11.975 42.8,11.925 42.775,11.9 42.175,11.9
-15V on Top Layer "-15V_L01_P003" (solid, pour order 12): 19.575,8.875 19.975,10.325 20.6,10.325 21.079,8.875 21.079,7.875 20.679,7.475 20.183,7.475 19.575,8.114
SYS_VBAT on Top Layer "SYS_VBAT_L01_P001" (solid, pour order 42): 61.025,30.525 62.775,30.525 63.388,31.137 63.125,31.8 60.675,31.8 60.425,31.55 60.425,31.05
SOLDIER_GUARD on Top Layer "SOLDIER_GUARD_L01_P001" (solid, pour order 41): 51.85,33.811 52.214,34.175 53.329,34.171 54.575,35.364 54.575,38.1 53.375,39.3 50,39.3 50,41.18 48.744,42.436 43.819,42.436 43.5,42.436 43.5,34.65 44.014,34.136 47.8,34.136 48.125,33.811
GUARD on Top Layer "GUARD_L01_P001" (solid, pour order 33): 11.702,27.525 11.702,25.55 6.906,25.55 6.102,25.917 6.102,27.273 6.847,27.525
A5VSW on Top Layer "A5VSW_L01_P001" (solid, pour order 26): 9.287,3.625 9.775,3.625 10.275,3.125 10.275,2.25 8.6,2.25 8.6,3.208
7V5 on Top Layer "7V5_L01_P004" (solid, pour order 18): 33.525,51.525 33.75,51.75 35.625,51.75 35.625,50.3 34.347,50.3 34.269,50.222 33.525,50.966 33.525,51.05
7V5 on Top Layer "7V5_L01_P003" (solid, pour order 17): 24.977,14.102 25.525,14.65 26.625,14.65 26.675,14.6 26.675,13.3 25.525,13.3 25.5,13.275 25.065,13.71 24.938,13.838
7V5 on Top Layer "7V5_L01_P002" (solid, pour order 13): 15.55,50.531 15.55,51.175 15.225,51.5 13.825,51.5 13.825,50.175 15.291,50.175
7V5 on Top Layer "7V5_L01_P001" (solid, pour order 7): 45.7,27.25 46.529,27.179 46.9,27.55 46.9,28.075 47.175,28.35 47.938,28.35 47.938,26.617 47.558,26.35 45.7,26.35
-15V on Top Layer "-15V_L01_P002" (solid, pour order 5): 48.125,21.525 49.225,21.525 49.225,20.25 49.175,20.2 46.075,18.95 45.587,19.787
-15V on Top Layer "-15V_L01_P001" (solid, pour order 4): 49.3,49.541 49.325,49.516 50.075,49.516 50.075,49.491 50.778,48.788 50.75,48.76 50.75,47.841 48.95,47.841 48.925,47.816 48.925,49.166 49.275,49.516
SYS_GND on Bottom Layer "SYS_GND_L04_P001" (solid, remove dead copper, pour order 52): -0.052,56.027 -0.025,56 74,56 74,0 0.048,0
SYS_GND on Bottom Layer "SYS_GND_L04_P002" (solid, pour order 36): 44.9,30.525 44.9,31.35 45.975,31.35 46.525,31.9 47.625,31.9 47.625,31.15 47.2,30.725 46.075,30.725 46.075,30.6 46,30.525
A5VSW on Bottom Layer "A5VSW_L04_P001" (solid, pour order 10): 42.05,30.5 43.975,32.425 46.075,32.425 46.075,31.65 45.825,31.4 44.575,31.4 44.575,30.95 42.975,29.35 42.325,29.35 39.4,29.35 39.4,30.5
A5V on Bottom Layer "A5V_L04_P001" (solid, pour order 51): 29.425,16.85 29.425,15.775 29.6,15.6 29.6,14.2 30.225,13.575 31.025,13.575 32.225,14.775 32.225,15.125 30.325,17.025 29.6,17.025
A5V on Bottom Layer "A5V_L04_P002" (solid, pour order 46): 53.2,28.275 53.2,29.85 52.45,30.6 51.225,30.6 51.225,29.25 52.2,28.275 52.225,28.275
SYS_VBAT on Bottom Layer "SYS_VBAT_L04_P003" (solid, pour order 45): 61.125,30.5 62.775,30.5 63.459,31.184 63.225,31.775 60.775,31.775 60.525,31.525 60.525,31.025
SYS_VBAT on Bottom Layer "SYS_VBAT_L04_P002" (solid, pour order 44): 54.487,45.163 55.937,45.163 56.05,45.051 56.125,44.325 58.9,44.101 58.9,42.45 58.875,42.426 55.825,42.426 55.6,42.651 55.575,42.626 54.375,42.626 52.925,44.075 49.85,44.075 49.85,44.025 49.2,43.376 46.05,43.376 46.05,45.351 46.025,45.375 46.1,45.451 54.2,45.451
SYS_VBAT on Bottom Layer "SYS_VBAT_L04_P001" (solid, pour order 39): 58.132,8 57.707,8.425 57.707,9.457 58.025,9.775 62.325,9.775 62.325,8.705 62.05,8.575 60.4,8.575 60.4,8.55 59.85,8
GUARD on Bottom Layer "GUARD_L04_P002" (solid, pour order 37): 8.5,38.464 8.5,34.146 4.532,34.146 3.262,35.416 3.262,37.321 4.405,38.464
GUARD on Bottom Layer "GUARD_L04_P001" (solid, pour order 32): 8.525,25.55 8.6,25.55 9.2,25.917 9.2,27.273 8.575,27.525 6.848,27.525 6.102,27.273 6.102,25.917 6.906,25.55
7V5 on Bottom Layer "7V5_L04_P004" (solid, pour order 24): 47.725,27.025 48.75,27.2 48.75,28.225 47.725,28.3 46.038,28.3 46.038,25.787 46.8,25.787 46.9,26.925
7V5 on Bottom Layer "7V5_L04_P003" (solid, pour order 23): 48.55,10.725 48.55,12.275 48.95,12.675 50.65,12.675 51.575,10.725 52.75,9.721 52.75,7.9 50.929,7.9 49.175,9.5 48.705,10.445
-16V on Bottom Layer "-16V5_L04_P001" (solid, pour order 21): 42.775,51.95 44.458,51.95 45.2,52.55 45.2,53.025 42.775,53.025
7V5 on Bottom Layer "7V5_L04_P002" (solid, pour order 20): 41.745,34.4 41.198,34.628 40.795,34.8 40.42,34.725 40.095,34.5 40.095,33.525 40.42,33.2 41.32,33.2 41.82,33.7
7V5 on Bottom Layer "7V5_L04_P001" (solid, pour order 14): 53.5,15.8 53.55,15.85 53.55,17.092 54.283,17.825 54.825,17.825 54.825,17.257 55.15,16.932 55.15,15.8
SOLDIER_GUARD on Bottom Layer "SOLDIER_GUARD_L04_P001" (solid, pour order 11): 47.704,33.825 46.78,36.756 49.325,39.3 49.743,39.3 53.375,39.3 54.575,38.1 54.575,35.364 53.329,34.171 52.214,34.175 51.864,33.825
-15V on Bottom Layer "-15V_L04_P001" (solid, pour order 6): 39.15,52 37.825,51.975 37.075,51.225 36.325,51.225 35.975,51.575 35.975,52.325 36.675,53.025 40.67,53.025 40.729,52.517 40.729,52.067
GUARD on Top Solder "GUARD_LTS_P004" (solid): 35.225,18.949 35.375,19.099 35.375,19.1 37.125,19.1 37.275,18.949 37.668,18.949 37.668,25.186 36.759,26.095 33.393,26.032 cw(c33.312,26.741) 32.868,26.182 30.487,28.407 27.039,28.407 24.057,31.52 24.043,32.957 23.262,33.738 23,33.725 22.862,33.863 22.862,34.138 21.443,35.557 20.743,34.857 20.743,34.707 19.843,34.707 19.768,34.632 21.493,32.907 21.493,31.373 22.232,30.634 22.243,30.607 26.212,26.532 29.543,26.532 32.106,23.97 31.857,23.721 31.857,19.819 32.727,18.949
GUARD on Top Solder "GUARD_LTS_P003" (solid): 21.975,38.6 22.1,38.75 22.225,38.85 22.375,38.925 22.55,39 22.8,39.043 22.925,39.025 23.1,39 23.3,38.925 23.425,38.85 23.525,38.8 23.649,38.701 23.8,38.475 23.913,38.188 23.925,37.975 23.9,37.8 23.85,37.55 23.767,37.35 23.675,37.225 23.55,37.15 23.25,37.05 21.529,35.329 21.527,35.329 20.748,34.55 19.499,34.551 19.498,34.55 14.55,34.55 14.55,17.075 15.375,16.25 17.75,16.25 18.05,15.95 18.05,14.087 17.374,13.625 13.232,13.625 11.075,15.968 11.075,33.084 9.993,34.166 4.532,34.166 3.262,35.436 3.262,37.341 4.405,38.484 10.628,38.484 11.547,39.403 11.55,44.175 15.175,47.8 19.3,47.8 21.7,50.2 21.741,50.525 21.8,50.725 22,51.044 22.276,51.224 22.425,51.275 22.575,51.3 22.8,51.325 23,51.325 23.2,51.3 23.4,51.25 23.508,51.218 23.767,51.036 24.062,50.69 24.1,50.55 24.1,49.962 23.961,49.649 23.709,49.367 23.325,49.175 21.288,47.137 21.313,47.112 20.355,46.154 20.35,46.154 20.125,45.925 16.075,45.925 13.975,43.825 13.975,40.158 14.55,39.525 14.55,36.3 20.075,36.3 21.9,38.125 21.9,38.45
GUARD on Top Solder "GUARD_LTS_P002" (solid): 23.399,45.116 23.399,45.126 21.2,47.325 19.925,46.05 19.75,46.05 19.569,46.019 22.592,42.99 22.612,42.975 26.103,39.403 28.372,39.403 33.625,34.15 39.125,34.15 39.325,34.35 39.325,36.125 39.125,36.325 39.125,42.4 37.35,42.4 37.193,42.275 35.15,42.275 35.025,42.4 33.15,42.4 32.2,41.45 32.2,38.605 28.968,41.675 26.85,41.675 23.41,45.115
no net on Top Solder "NONET_LTS_P002" (solid): 43.475,34.65 43.975,34.15 43.975,34.136 47.8,34.136 48.125,33.811 51.536,33.811 51.928,34.203 53.357,34.197 54.575,35.364 54.575,38.1 53.375,39.3 49.975,39.3 49.975,41.204 48.804,42.375 47.05,42.375 47.01,42.325 44.743,42.325 44.693,42.375 43.475,42.375
no net on Top Solder "NONET_LTS_P001" (solid): 0,34.375 0,0.15 0.15,0 74,0 74,56 -0.05,56 -0.05,34.375 1.8,34.375 1.8,3.5 3.775,1.525 69.775,1.525 72.175,3.5 72.175,51.525 69.775,54.075 4.325,54.075 1.775,51.525 1.8,34.375
GUARD on Top Solder "GUARD_LTS_P001" (solid): 11.638,27.525 11.638,25.6 6.817,25.6 6.101,25.936 6.101,27.271 6.837,27.525
GUARD on Bottom Solder "GUARD_LBS_P002" (solid): 8.5,38.484 8.5,34.166 4.532,34.166 3.262,35.436 3.262,37.341 4.405,38.484
no net on Bottom Solder "NONET_LBS_P001" (solid): 0.025,34.372 0.025,0.125 0.15,0 74,0 74,56 -0.05,56 0.025,34.375 1.8,34.325 1.8,3.5 3.775,1.525 69.825,1.525 72.225,4.35 72.225,50.775 69.825,54.075 4.325,54.075 1.775,51.525 1.8,34.325
no net on Bottom Solder "NONET_LBS_P002" (solid): 47.85,34.989 47.85,36.825 47.85,37.793 49.346,39.289 49.764,39.289 53.396,39.289 54.596,38.089 54.45,35.425 53.55,34.525 48.094,34.525
GUARD on Bottom Solder "GUARD_LBS_P001" (solid): 6.797,25.6 8.682,25.6 9.2,25.917 9.2,27.273 8.575,27.525 6.848,27.525 6.103,27.273 6.103,25.917

## Silkscreen, mask and mechanical layers (free items; w line width, h text height)
Top Overlay:
  drawing of 4 lines, arcs and shapes, not listed
  text "ALTAIR PD Readout" at 45.375,51.825 h1.5
  text "Sergeant" at 57.925,50 h1.25
  text "Uvic," at 51.375,46.4 h1.5
  text "P.D.B.," at 55.55,44.854 h1.2
  text "D.R.," at 51.55,44.804 h1.2
  text "V26.2B" at 51.45,42.8 h1.25
Bottom Overlay:
  text "TP5" at 35.55,52.375 h0.8
  text "TP4" at 6.05,44.325 h0.8
  text "TP3" at 33.225,16.05 h0.8
  text "TP2" at 43.375,14.575 h0.8
  text "TP7" at 7.725,13.75 h0.8
  text "TP9" at 47.075,12.731 h0.8
  text "TP1" at 35.7,11.2 h0.8
  text "TP6" at 14.425,10.25 h0.8
  text "TP8" at 57.25,2.275 h0.8

## Dimensions
74,0 to 74,56 on Mechanical 1
0,0 to 74,0 on Mechanical 1

## Text inside footprints (layer, text, board x,y; h text height)
U6: Mechanical 13 "*" at 44.831,31.178 h1.27